# EAGLE board Main (EAGLE 9.6.2)

Size 110.49 x 83.82 mm. Coordinates in mm from the lower left corner, seen from the top.
Outline: 0,0 0,1.27
Outline: 0,1.27 0,83.82 110.49,83.82 110.49,1.27 0,1.27
Copper layers (1*16): Top 0.035mm / dielectric 1.5mm / Bottom 0.035mm
Design rules "default": minimum track width 6mil, minimum drill 0.35mm, track to track 6mil, track to pad 6mil, pad to pad 6mil, via to via 6mil, smd to smd 6mil, copper to edge 40mil, drill to drill 6mil, minimum pad ring 10mil, minimum via ring 8mil, stop-mask expansion 4mil, vias tented up to drill 0mil, thermal gap 10mil
Net classes: 1 power: width 0.203 mm

## Footprints (pad centres in the part's own frame; a part is rotated, then mirrored left to right if it is on the bottom)
0805 = smd 0.8 x 1.2: 1 -0.9,0; 2 0.9,0
C1206 = smd 1.6 x 1.8: 1 -1.4,0; 2 1.4,0
153CLV-1010 = smd 4 x 2.5: + 4,0; - -4,0
153CLV-0605 = smd 3.5 x 1.6: + 2.7,0; - -2.7,0
CAP-PTH-5MM = drill 0.7 pad 1.651: 1 -2.5,0; 2 2.5,0
SOD123-2.7X1.6 = smd 1.2 x 1.02: 1 -1.635,0; 2 1.635,0
DO-214AC = smd 1.8 x 2.4: A 2.025,0; C -2.025,0
SOD80 = smd 1.4 x 1.8: 1 -1.7,0; 2 1.7,0
1X05 = drill 1.016 pad 1.88: 1 0,0; 2 2.54,0; 3 5.08,0; 4 7.62,0; 5 10.16,0
TQFP32-08 = smd 1.27 x 0.559: 1 -4.293,2.8; 2 -4.293,2; 3 -4.293,1.2; 4 -4.293,0.4; 5 -4.293,-0.4; 6 -4.293,-1.2; 7 -4.293,-2; 8 -4.293,-2.8; 17 4.293,-2.8; 18 4.293,-2; 19 4.293,-1.2; 20 4.293,-0.4; 21 4.293,0.4; 22 4.293,1.2; 23 4.293,2; 24 4.293,2.8 | smd 0.559 x 1.27: 9 -2.8,-4.293; 10 -2,-4.293; 11 -1.2,-4.293; 12 -0.4,-4.293; 13 0.4,-4.293; 14 1.2,-4.293; 15 2,-4.293; 16 2.8,-4.293; 25 2.8,4.293; 26 2,4.293; 27 1.2,4.293; 28 0.4,4.293; 29 -0.4,4.293; 30 -1.2,4.293; 31 -2,4.293; 32 -2.8,4.293
TO252 = smd 1 x 1.6: 1 -2.28,-4.8; 2 2.28,-4.8 | smd 5.4 x 6.2: TAB 0,2.5
1X07 = drill 1.016 pad 1.88: 1 0,0; 2 2.54,0; 3 5.08,0; 4 7.62,0; 5 10.16,0; 6 12.7,0; 7 15.24,0
LED3MM = drill 0.813 pad 1.676 octagon: A -1.27,0; K 1.27,0
DIL4-SMD = smd 1.6 x 2: 1 -1.27,-4.77; 2 1.27,-4.77; 3 1.27,4.77; 4 -1.27,4.77
SOT23-3 = smd 0.8 x 0.9: 1 -0.95,-1; 2 0.95,-1; 3 0,1.1
SOT23-BEC = smd 1 x 1.4: B -0.95,-1.1; C 0,1.1; E 0.95,-1.1
SOIC127P600X175-14N = smd 1.981 x 0.559: 1 -2.362,3.81; 2 -2.362,2.54; 3 -2.362,1.27; 4 -2.362,0; 5 -2.362,-1.27; 6 -2.362,-2.54; 7 -2.362,-3.81; 8 2.362,-3.81; 9 2.362,-2.54; 10 2.362,-1.27; 11 2.362,0; 12 2.362,1.27; 13 2.362,2.54; 14 2.362,3.81
16P-18.5X13.5X0.8 = smd 1.7 x 1: 1 -6.6,2.15; 2 -6.6,0.65; 3 -6.6,-0.85; 4 -6.6,-2.35; 5 -6.6,-3.85; 6 -6.6,-5.35; 7 -6.6,-6.85; 8 -6.6,-8.35; 9 6.6,-8.35; 10 6.6,-6.85; 11 6.6,-5.35; 12 6.6,-3.85; 13 6.6,-2.35; 14 6.6,-0.85; 15 6.6,0.65; 16 6.6,2.15
SOT223 = smd 1.219 x 2.235: 1 -2.311,-3.099; 2 0,-3.099; 3 2.311,-3.099 | smd 3.6 x 2.2: 4 0,3.099
SRD-05VDC-SL-C = drill 1.2 pad 2.184: COIL0 -5.39,-6.12; COIL1 -5.39,5.88; SWCLOSED 6.61,-6.12; SWCOMMON -7.39,-0.12; SWOPEN 6.61,5.88
RESONATOR-SMD = smd 0.45 x 1.905: 1 -1.2,0; 2 0,0; 3 1.2,0

## Placement (x,y rotation side)
C1  0.1uF  [0805]  -5.08,69.85 0 top  (outside the outline)
C2  10uF  [C1206]  30.48,52.07 0 top
C3  0.1uF  [0805]  52.07,73.66 0 top
C4  22uF  [C1206]  24.13,52.07 0 top
C5  4.7uF  [C1206]  36.83,52.07 0 top
C6  0.1uF  [0805]  34.29,24.13 315 top
C7  0.1uF  [0805]  35.56,25.4 315 top
C8  0.1uF  [0805]  22.86,27.94 270 top
C9  0.1  [0805]  36.83,73.66 0 top
C10  220/50  [153CLV-1010]  74.93,85.09 0 top
C11  100/35  [153CLV-0605]  86.36,85.09 0 top
C12  0.1uF  [0805]  29.21,72.39 0 top
C13  0.1uF  [0805]  22.86,16.51 315 top
C14  0.1uF  [0805]  25.4,73.66 0 top
C15  10uf  [153CLV-0605]  88.9,58.42 0 top
C16  0.1  [CAP-PTH-5MM]  3.81,64.77 0 top
C18  0.1  [0805]  21.59,73.66 0 top
D1  SMF5.0A  [SOD123-2.7X1.6]  7.62,59.69 0 top
D2  SMF5.0A  [SOD123-2.7X1.6]  1.27,59.69 0 top
D3  SZ105B  [DO-214AC]  118.11,45.72 0 top  (outside the outline)
D4  SZ105B  [DO-214AC]  110.49,45.72 0 top
D12  4148  [SOD80]  45.72,19.05 180 top
ECU  [1X05]  19.05,29.21 90 top
IC1  MEGA8-AI  [TQFP32-08]  29.21,20.32 45 top
IC2  LM1117DTX-5.0  [TO252]  74.93,73.66 90 top
JP1  [1X07]  19.05,24.13 270 top
JP2  [1X05]  24.13,8.89 0 top
LED1  BT_STATE  [LED3MM]  30.48,44.45 0 top
LED2  PW  [LED3MM]  25.4,44.45 0 top
LED3  RY  [LED3MM]  20.32,44.45 0 top
OK1  PC817  [DIL4-SMD]  44.45,13.97 270 top
Q3  BSS138BK  [SOT23-3]  12.7,64.77 0 top
Q4  BSS138BK  [SOT23-3]  8.89,64.77 0 top
R1  10k  [0805]  -1.27,64.77 0 top
R2  10k  [0805]  -5.08,64.77 0 top  (outside the outline)
R3  10k  [0805]  52.07,69.85 0 top
R4  10k  [0805]  48.26,69.85 0 top
R5  1k  [0805]  68.58,58.42 90 top
R6  1k  [0805]  40.64,69.85 0 top
R7  1k  [0805]  67.31,50.8 270 top
R8  10k  [0805]  33.02,69.85 0 top
R9  10k  [0805]  25.4,27.94 90 top
R10  10k  [0805]  25.4,69.85 0 top
R11  10k  [0805]  21.59,69.85 0 top
R12  330  [0805]  39.37,8.89 90 top
R13  4.7k  [0805]  17.78,69.85 0 top
R14  1k  [0805]  13.97,69.85 0 top
R15  2.2k  [0805]  10.16,69.85 0 top
R16  1k  [0805]  6.35,69.85 0 top
R17  1k  [0805]  41.91,8.89 270 top
R18  3.9k  [0805]  44.45,8.89 90 top
R19  10k  [0805]  2.54,69.85 0 top
R20  20k  [0805]  -1.27,69.85 0 top
SENSOR  [1X05]  72.39,29.21 90 top
T3  BC817  [SOT23-BEC]  48.26,8.89 270 top
U1  MCP4922-E/SL  [SOIC127P600X175-14N]  44.45,29.21 90 top
U2  HM-11  [16P-18.5X13.5X0.8]  57.15,55.88 0 bottom
U4  LM1117 3.3  [SOT223]  85.09,71.12 180 top
U$1  MCP3424-E/SL  [SOIC127P600X175-14N]  58.42,29.21 90 top
U$10  RELAYPTH  [SRD-05VDC-SL-C]  60.96,15.24 0 top
Y1  16MHZ  [RESONATOR-SMD]  25.4,13.97 315 top

## Library data of the parts
C1 = SparkFun-Capacitors
C2 C4 C5 C10 C11 C15 LED1-LED3 = adafruit
C3 C6-C9 C12-C14 C16 C18 R12 R17 R18 = SparkFun-Passives
D1 D2 = discrete
D3 D4 = diode
D12 = semicon-smd-ipc
ECU JP1 JP2 SENSOR = SparkFun
IC1 = atmel; MPN: ATMEGA8-16AU; OC_FARNELL: 9171371; OC_NEWARK: 73M8863
IC2 = lm1117
OK1 = optocoupler
Q3 Q4 = SparkFun-DiscreteSemi; PROD_ID: TRANS-00830
R1-R11 R13-R16 R19 R20 = SparkFun-Resistors
T3 = transistor
U1 = Microchip_By_element14_Batch_1; MPN: MCP4922-E/SL; OC_FARNELL: 1332114; OC_NEWARK: 08J8748; PACKAGE: SOIC14; SUPPLIER: Microchip
U2 = template
U4 = SparkFun-PowerIC; PROD_ID: VREG-08170
U$1 = Microchip_By_element14_Batch_1; MPN: MCP3424-E/SL; OC_FARNELL: 1630424; OC_NEWARK: 54M4871; PACKAGE: SOIC-14; SUPPLIER: Microchip
U$10 = SRD-05VDC-SL-C
Y1 = SparkFun-FreqCtrl; PROD_ID: XTAL-08900

## Nets
3.3V: C1.1 C2.1 C3.1 C4.1 Q3.1 Q4.1 R1.2 R3.2 R16.1 U2.9 U4.2 U4.4
12V: C10.+ C12.1 ECU.1 IC2.2 SENSOR.1
A0: C18.1 D4.C IC1.23 R13.1 R15.2
A1: IC1.24 R6.2 U2.15
A2: IC1.25 JP1.3
A3: IC1.26 JP1.4
CS: IC1.14 U1.3
D2: IC1.32 JP1.5
D3: IC1.1 JP1.6
D4: IC1.2 JP1.7
D5: IC1.9 R12.1
D6: IC1.10
D7: IC1.11 R11.1 U1.8
D8: D2.2 IC1.12 Q3.3 R2.1
D9: D1.2 IC1.13 Q4.3 R4.1
GND: C1.2 C2.2 C3.2 C4.2 C5.2 C6.1 C7.1 C9.2 C10.- C11.- C12.2 C13.2 C14.2 C15.- C16.2 C18.2 D1.1 D2.1 D4.A IC1.3 IC1.5 IC1.21 IC2.1 JP1.2 JP2.4 LED1.K LED3.K R14.2 R15.1 R18.1 T3.E U1.12 U2.12 U4.1 U$1.5 U$1.9 U$1.10 Y1.2
GNDAIR: D3.A ECU.2 R20.1 SENSOR.2 U$1.2
GNDTEMP: ECU.5 SENSOR.5
MISO: IC1.16
MOSI: IC1.15 U1.5
N$1: LED1.A R6.1
N$2: R16.2 U2.16
N$3: R5.1 U2.2
N$5: IC1.8 Y1.3
N$6: R7.1 U2.4
N$7: IC1.7 Y1.1
N$8: C7.2 IC1.20
N$10: C8.1 JP2.1
N$12: LED2.K R14.1
N$16: R10.1 U1.9
N$20: OK1.3 R17.1
N$21: R17.2 R18.2 T3.B
N$22: D12.2 T3.C U$10.COIL0
N$23: OK1.1 R12.2
N$31: LED3.A OK1.2
OUTSIGN: ECU.3 U1.14
RST: C8.2 IC1.29 R9.1
RXD: IC1.30 JP2.2
RXD1: Q4.2 R3.1 R7.2
SCK: IC1.17 U1.4
SCL: IC1.28 R19.2 U$1.8
SDA: IC1.27 R8.1 U$1.7
SENS_IN: D3.C R13.2 R20.2 SENSOR.3 U$1.1
SENSORINTEMP: SENSOR.4 U$10.SWCLOSED
SENSOROUTTEMP: ECU.4 U$10.SWCOMMON
TXD: IC1.31 JP2.3
TXD1: Q3.2 R1.1 R5.2
VCC: C5.1 C6.2 C9.1 C11.+ C13.1 C14.1 C15.+ C16.1 D12.1 IC1.4 IC1.6 IC1.18 IC2.TAB JP1.1 JP2.5 LED2.A OK1.4 R2.2 R4.2 R8.2 R9.2 R10.2 R11.2 R19.1 U1.1 U1.11 U1.13 U4.3 U$1.6 U$10.COIL1

## Tracks (layer width: path | path; a pad name or v marks a point on that pad's centre or on a via)
3.3V  (11 unrouted)
12V  (4 unrouted)
A0  (4 unrouted)
A1  (2 unrouted)
A2  (1 unrouted)
A3  (1 unrouted)
CS  (1 unrouted)
D2  (1 unrouted)
D3  (1 unrouted)
D4  (1 unrouted)
D5  (1 unrouted)
D7  (2 unrouted)
D8  (3 unrouted)
D9  (3 unrouted)
GND  (37 unrouted)
GNDAIR  (4 unrouted)
GNDTEMP  (1 unrouted)
MOSI  (1 unrouted)
N$1  (1 unrouted)
N$2  (1 unrouted)
N$3  (1 unrouted)
N$5  (1 unrouted)
N$6  (1 unrouted)
N$7  (1 unrouted)
N$8  (1 unrouted)
N$10  (1 unrouted)
N$12  (1 unrouted)
N$16  (1 unrouted)
N$20  (1 unrouted)
N$21  (2 unrouted)
N$22  (2 unrouted)
N$23  (1 unrouted)
N$31  (1 unrouted)
OUTSIGN  (1 unrouted)
RST  (2 unrouted)
RXD  (1 unrouted)
RXD1  (2 unrouted)
SCK  (1 unrouted)
SCL  (2 unrouted)
SDA  (2 unrouted)
SENS_IN  (4 unrouted)
SENSORINTEMP  (1 unrouted)
SENSOROUTTEMP  (1 unrouted)
TXD  (1 unrouted)
TXD1  (2 unrouted)
VCC  (29 unrouted)